# Altium PCB PCB1.PcbDoc
Units mm, origin at the board's own origin, x right, y up, seen from the top; angles counter-clockwise.
Board outline 127 x 101.6 mm, 4 copper layers (Top Layer, Internal Plane 1, Internal Plane 2, Bottom Layer); 48 components, 38 nets, 186 pads, 0 vias.
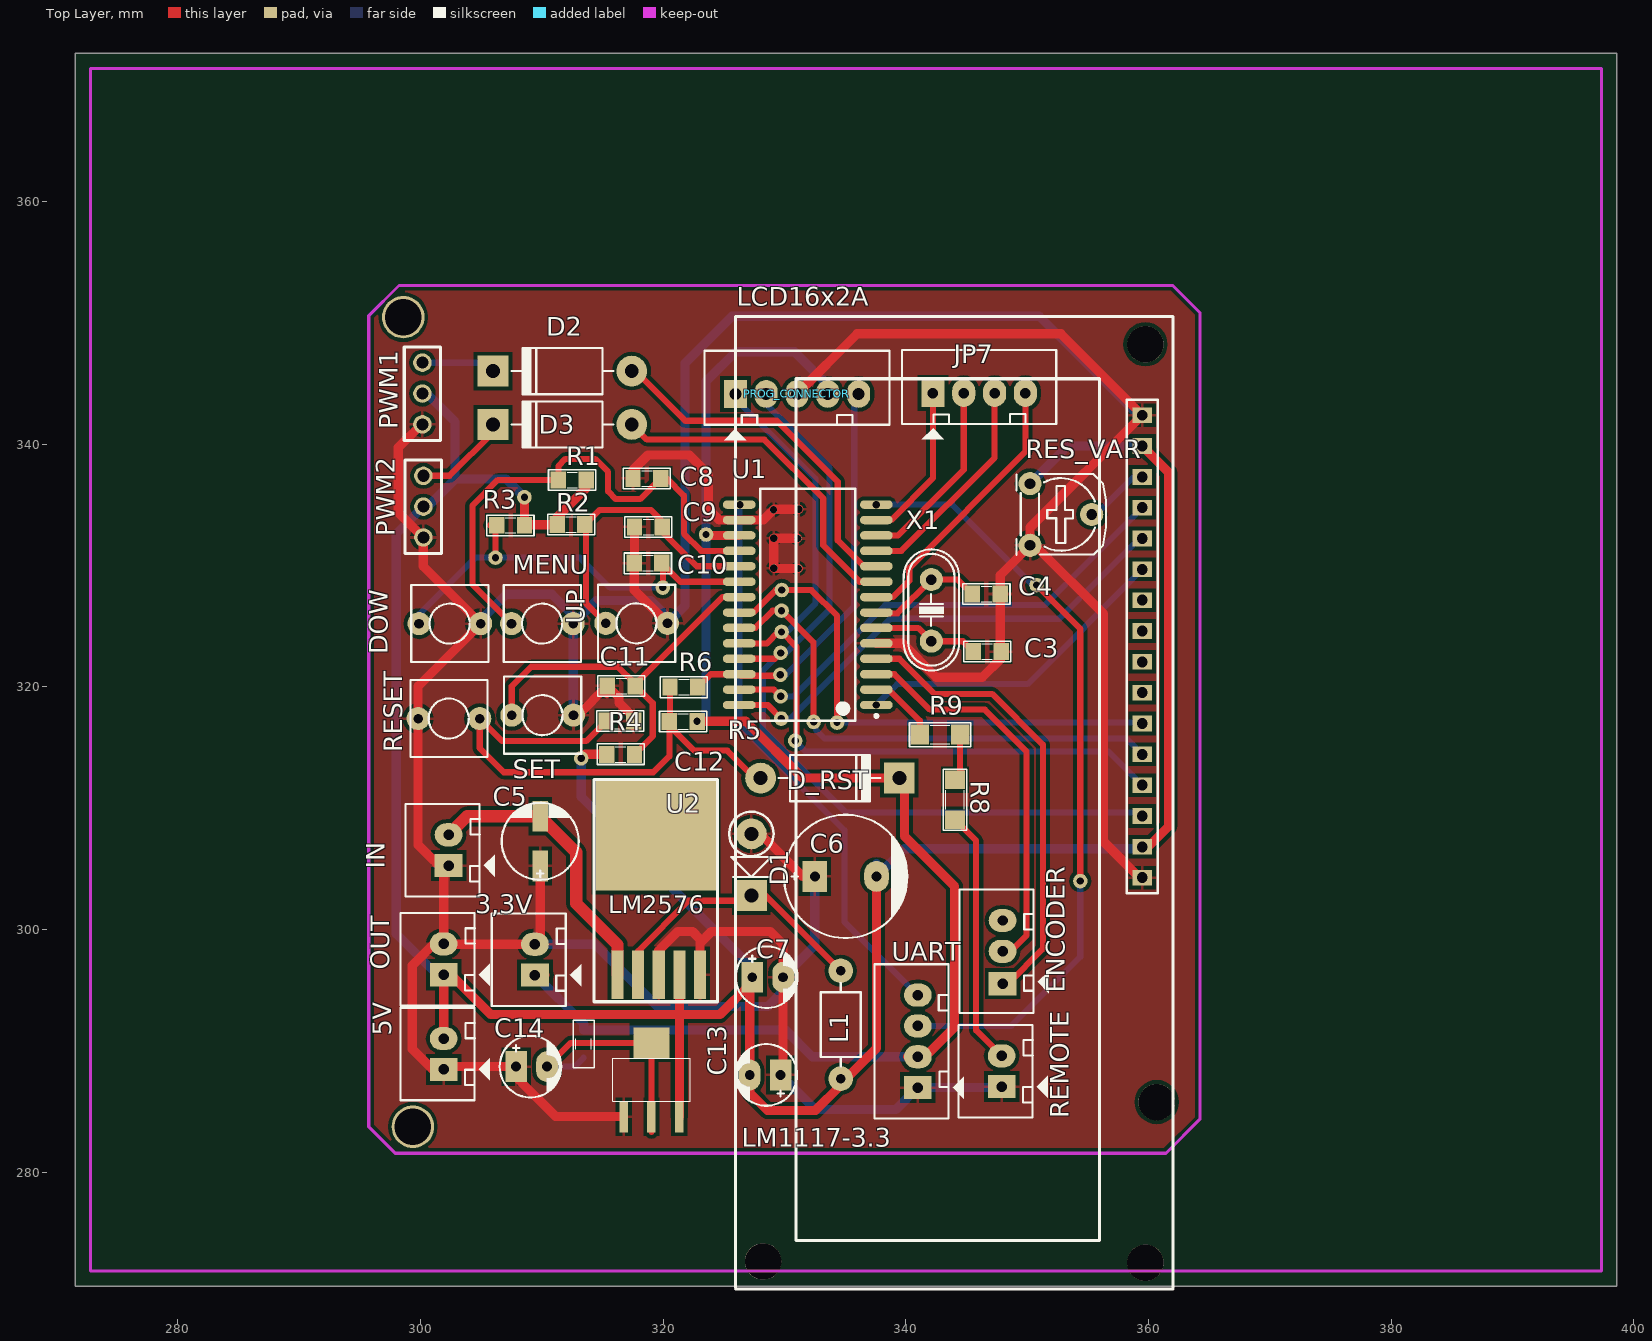
[diagram p0: Top Layer view]
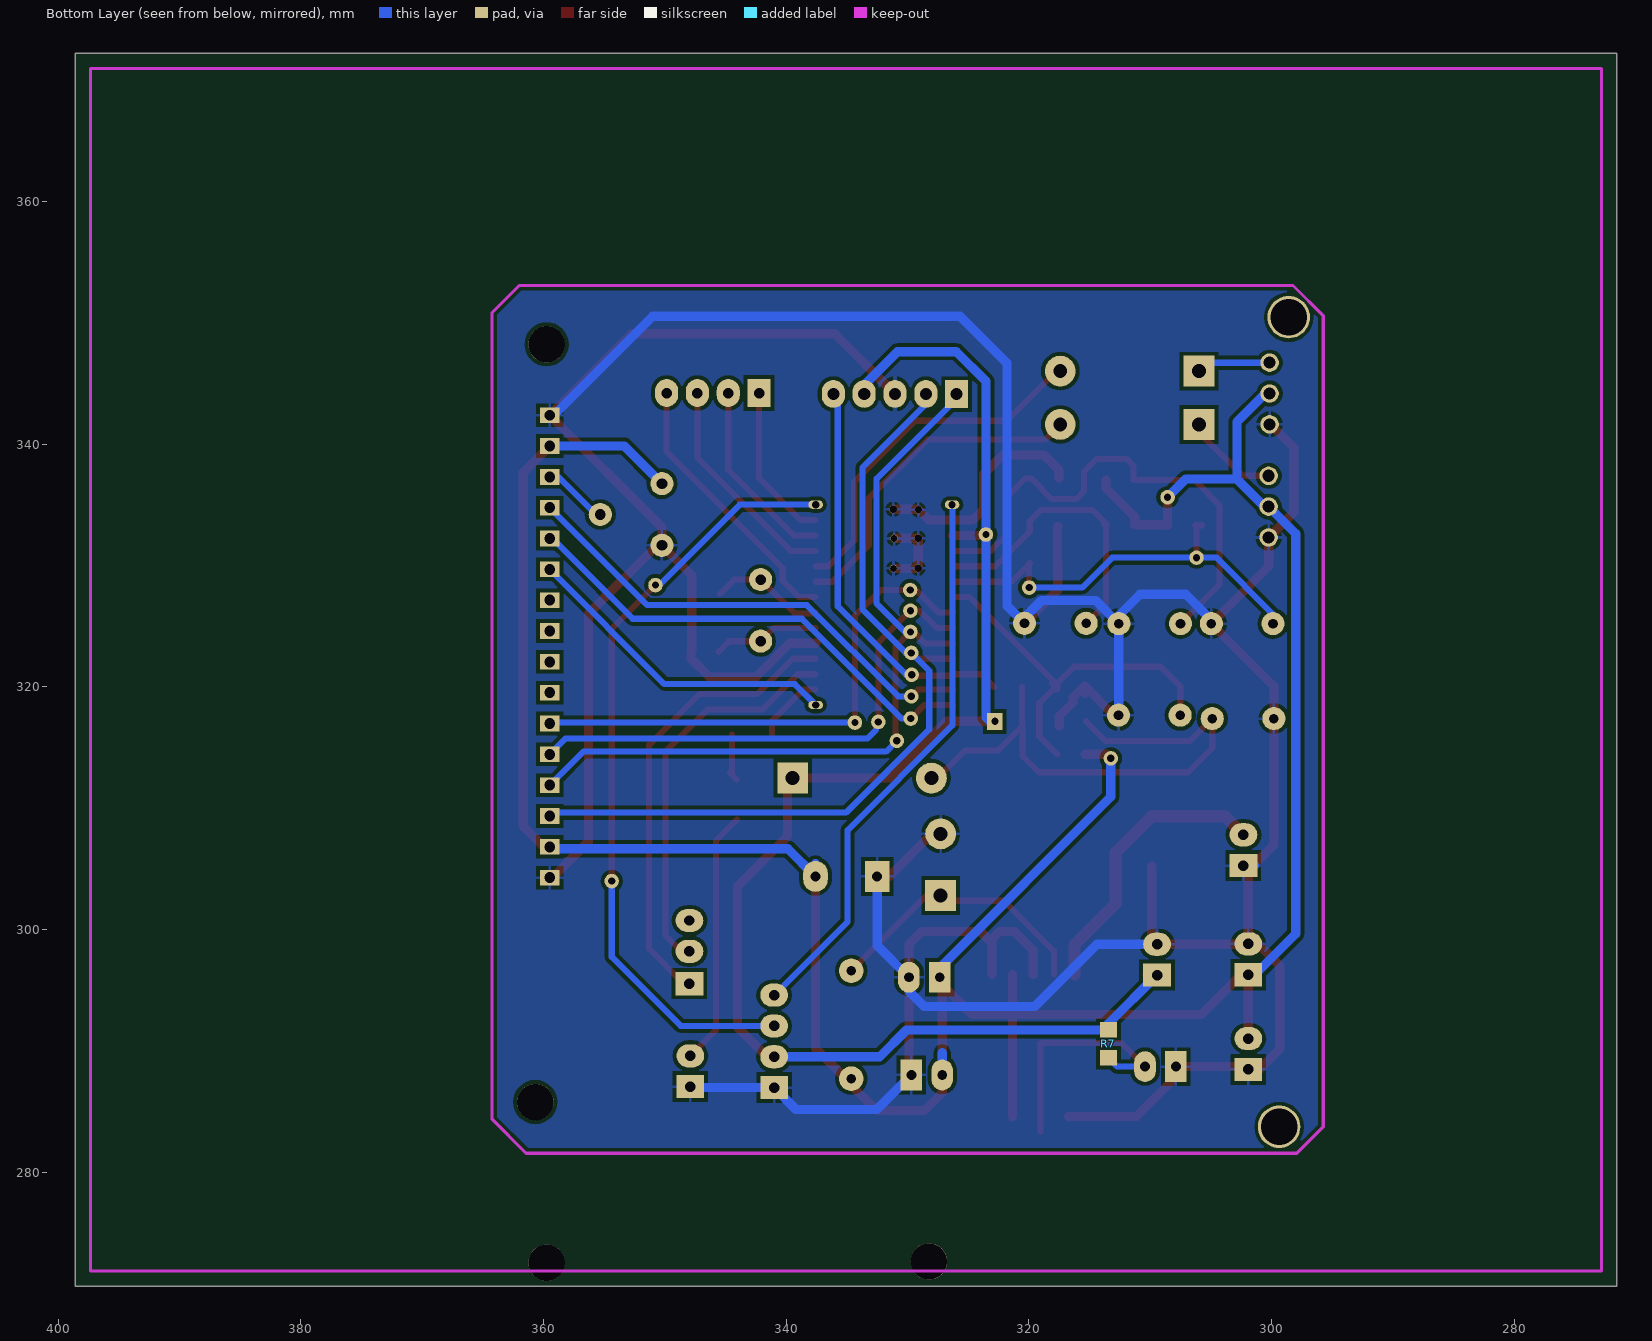
[diagram p1: Bottom Layer view, seen from below]
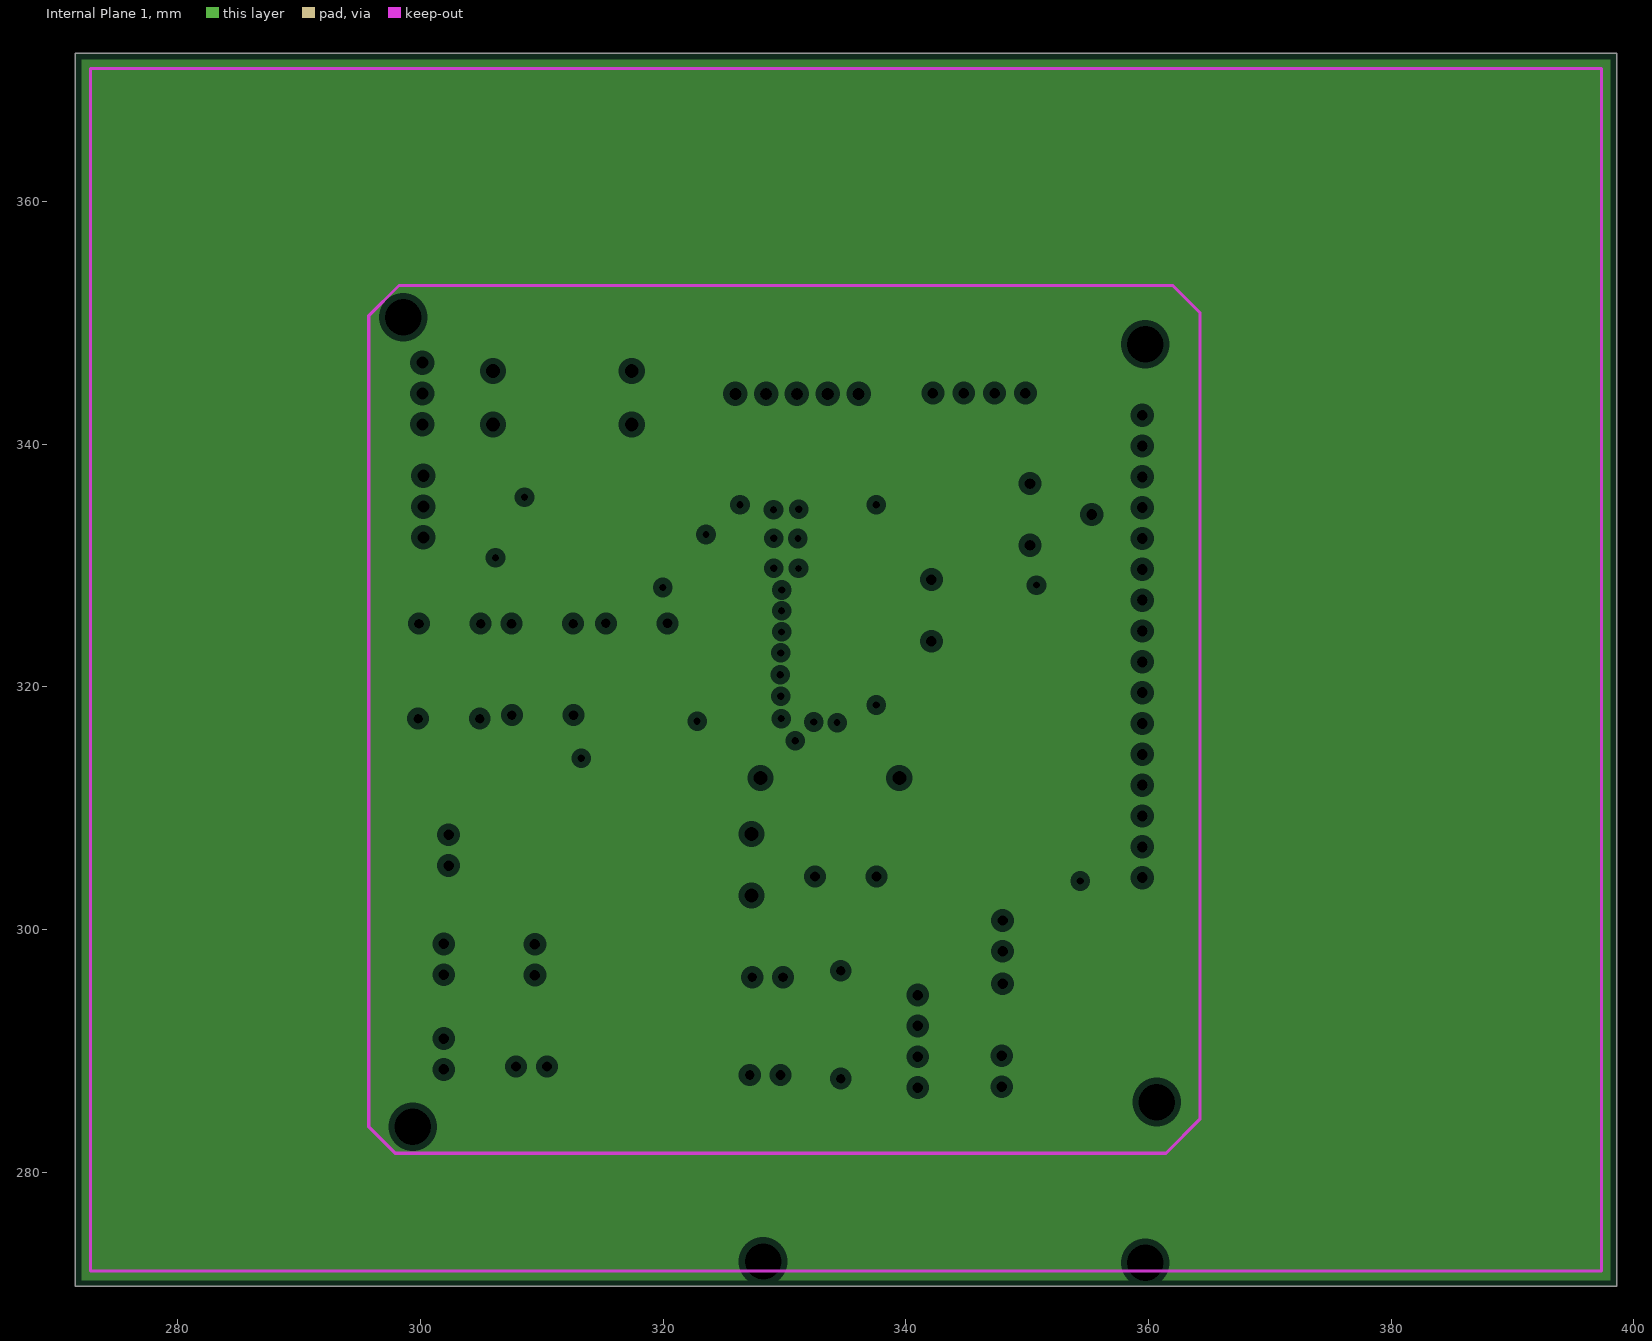
[diagram p2: Internal Plane 1, clearances drawn from the general rule]
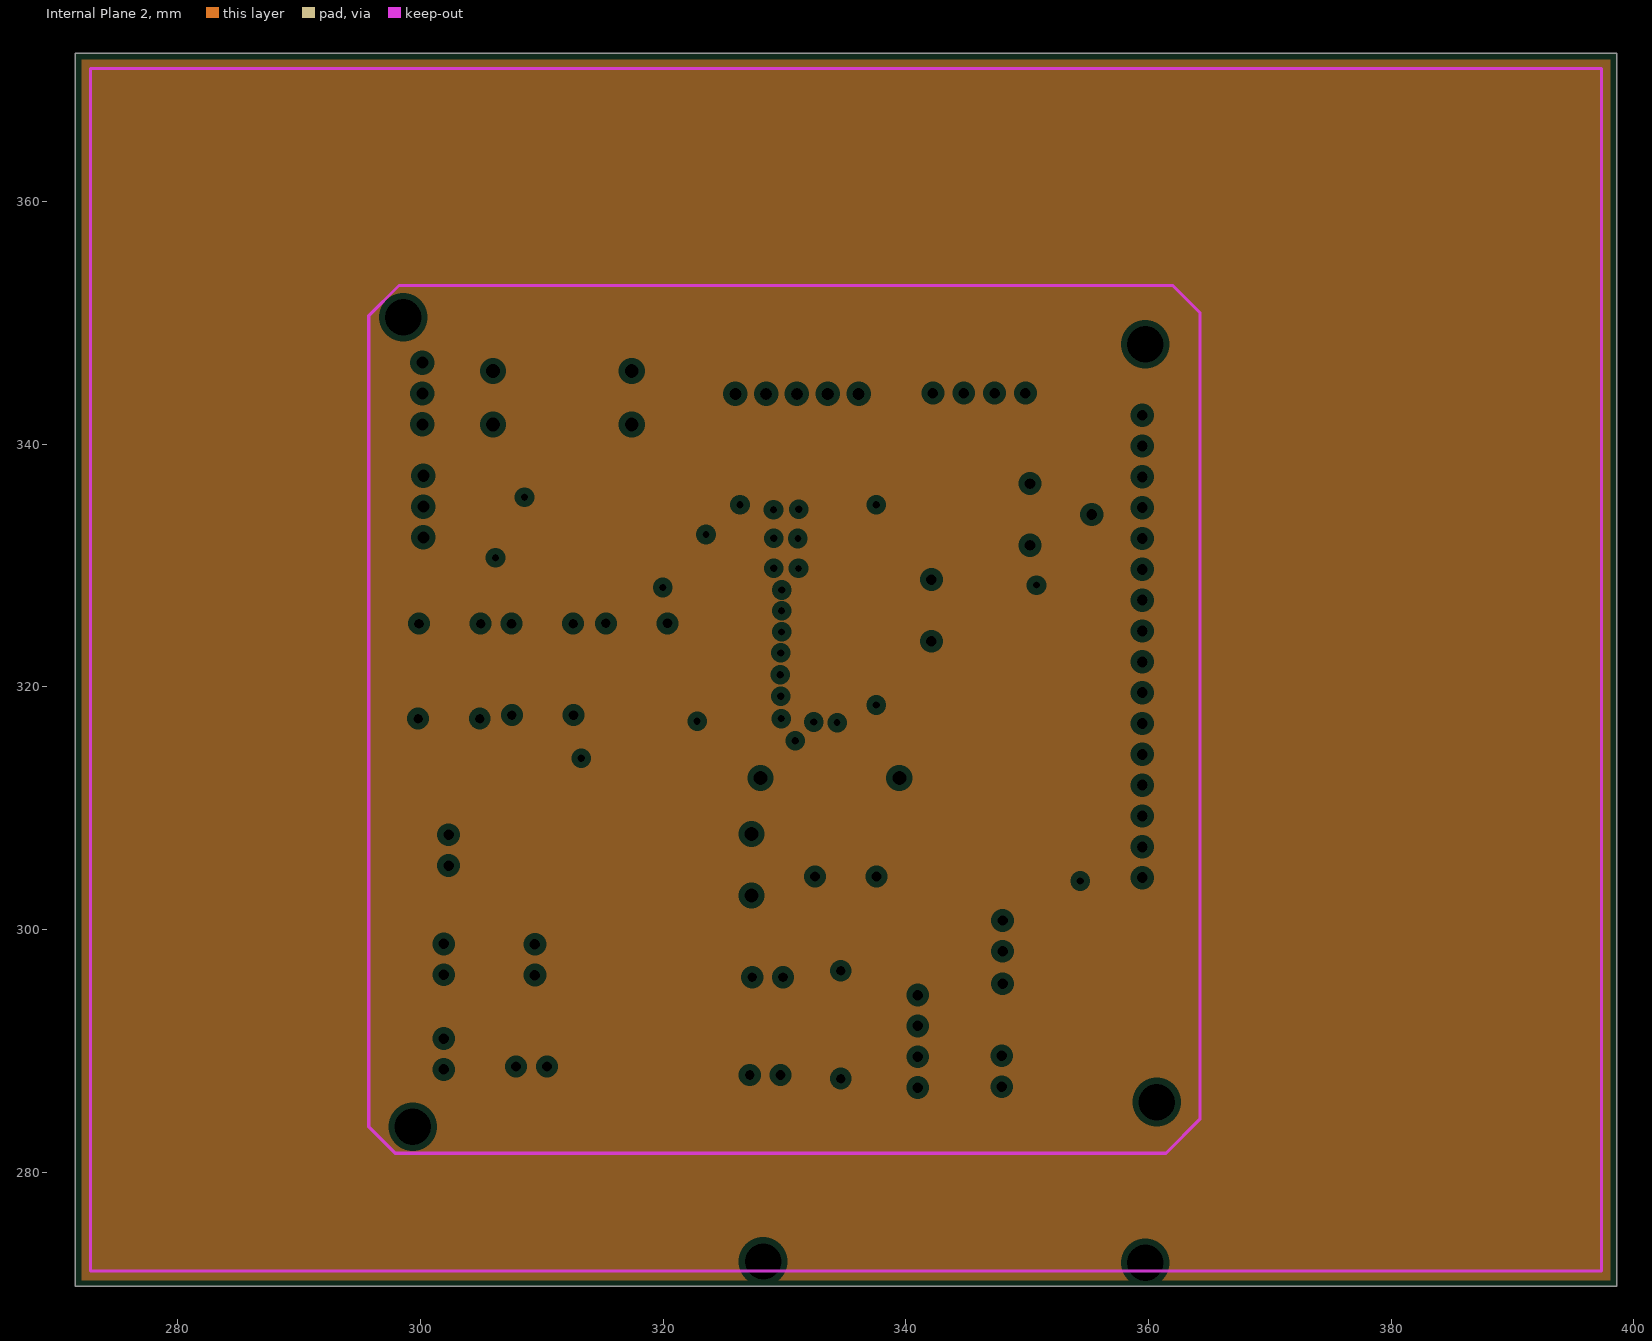
[diagram p3: Internal Plane 2, clearances drawn from the general rule]
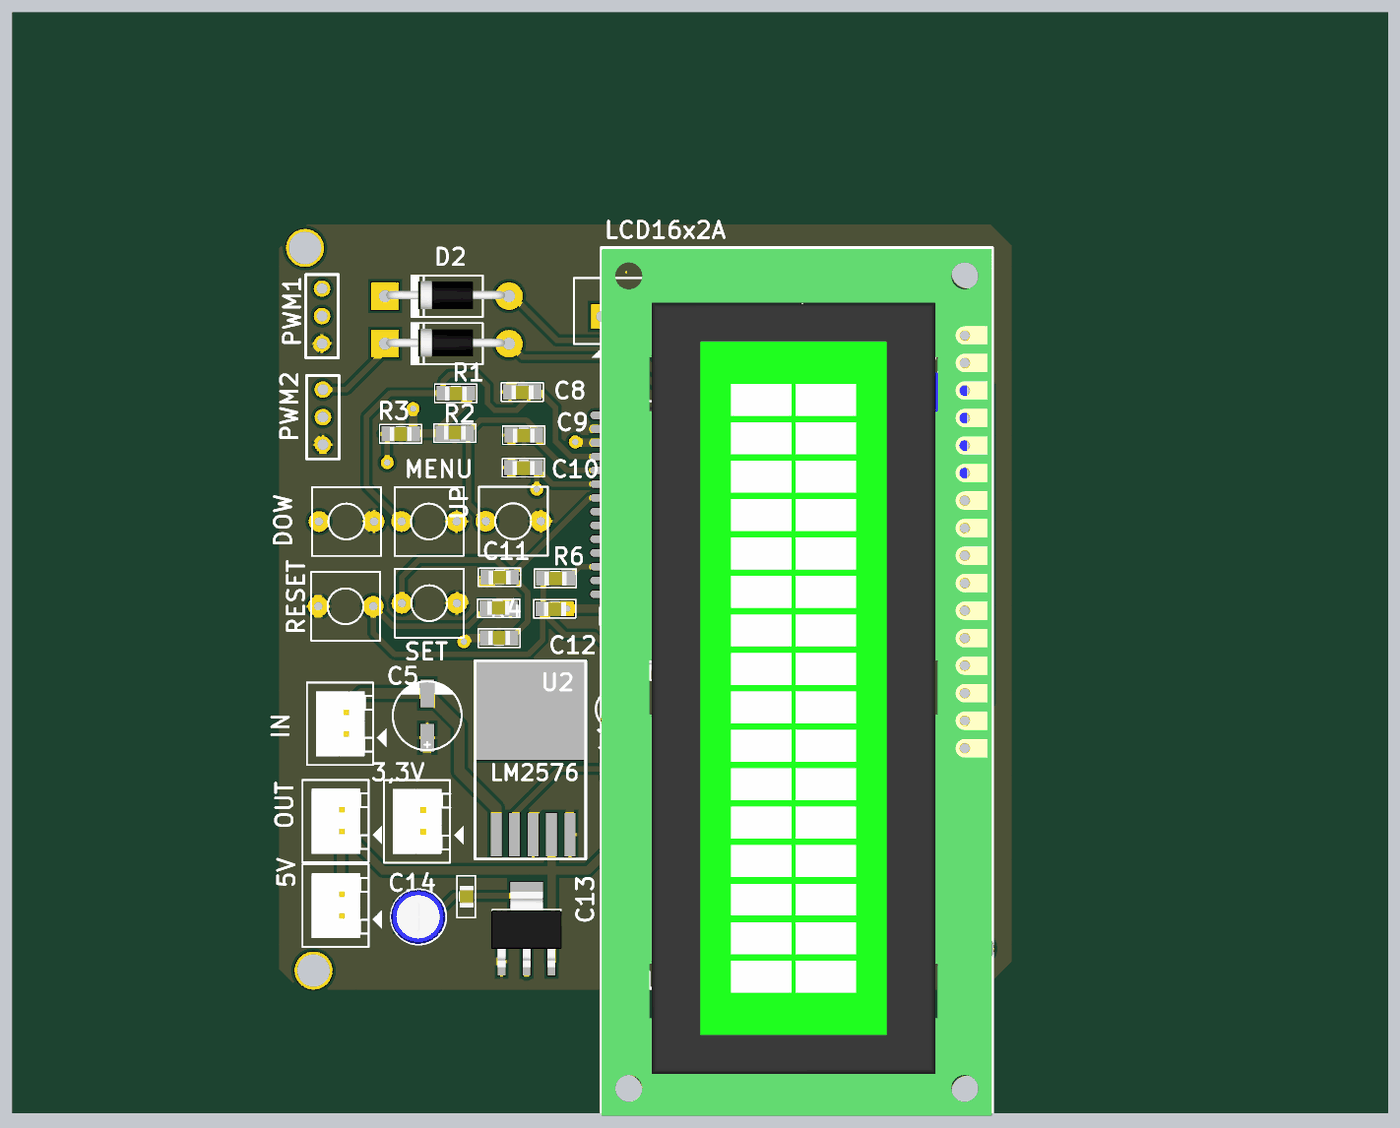
[diagram p4: 3D render of the assembled board from above, using the file's embedded part models]

## Layer stack, top to bottom
Top Layer: signal copper 0.0356
Dielectric: dielectric 0.32, FR-4, Dk 4.8
Internal Plane 1: plane copper 0.0356
Dielectric: dielectric 0.32, FR-4, Dk 4.8
Internal Plane 2: plane copper 0.0356
Dielectric: dielectric 0.32, FR-4, Dk 4.8
Bottom Layer: signal copper 0.0356

## Board outline
271.577,270.612 398.577,270.612 398.577,372.212 271.577,372.212

## Design rules (kind name [scope] priority, off if disabled: settings)
Clearance [All] p1: gap=0.305
PlaneClearance [All] p1: clearance=0.508
PlaneConnect [All] p1: planeconnectstyle=Relief reliefexpansion=0.508 reliefentries=4 reliefconductorwidth=0.254 reliefairgap=0.254
PolygonConnect [All] p1: connectstyle=Relief reliefconductorwidth=0.254 reliefentries=4 polygonreliefangle="90 Angle"
RoutingVias [All] p1: holewidth=0.635 width=1.016 viastyle="Through Hole" minholewidth=0.711 minwidth=1.27 maxholewidth=0.711 maxwidth=1.27
SilkscreenOverComponentPads [All] p1: minsilkscreentomaskgap=0.254
SolderMaskExpansion [All] p1: expansion=0.102
Width Width_4 [InNet('NetC5_2')] p1: maxlimit=1.016 minlimit=1.016 preferedwidth=1.016
Width Width_3 [InNet('GND')] p2: maxlimit=0.762 minlimit=0.762 preferedwidth=0.762
Width Width_2 [InNet('5VDC')] p3: maxlimit=0.762 minlimit=0.762 preferedwidth=0.762
Width Width_1 [InNet('3.3VDC')] p4: maxlimit=0.762 minlimit=0.762 preferedwidth=0.762
Width [All] p5: maxlimit=0.508 minlimit=0.508 preferedwidth=0.508
25 further rules are at their usual default settings.

## Components (designator, comment, footprint, x,y, rotation, side; value= is the part's Value field where it differs from the comment)
3,3V "JP2" CON2 309.448,296.266 r90 top
5V "JP2" CON2 301.93,288.493 r90 top
C3 "22" SM-0805#1 346.71,322.91 r180 top
C4 "22" SM-0805#1 346.634,327.66 r180 top
C5 "100uF" CP1/2.5_SM 309.88,306.019 r90 top
C6 "1000uF" CP2/4 332.511,304.394 r0 top
C7 "0.1uF" CP1/2 327.355,296.088 r0 top
C8 "Cap" SM-0805#1 318.668,337.185 r0 top
C9 "Cap" SM-0805#1 318.795,333.197 r0 top
C10 "Cap" SM-0805#1 318.77,330.2 r0 top
C11 "Cap" SM-0805#1 316.56,320.091 r0 top
C12 "104" SM-0805#1 316.459,317.195 r180 top
C13 "Cap" CP1/2 329.692,288.036 r180 top
C14 "Cap" CP1/2 307.899,288.722 r0 top
D1 "1N4007" D2AN 327.279,302.819 r90 top
D2 "1N4007" D2A 305.994,346.024 r0 top
D3 "1N4007" D2A 305.994,341.63 r0 top
D_RST "1N5408" D2A 339.471,312.496 r180 top
DOW "SW" SW2 299.898,325.222 r0 top
ENCODER "JP3" CON3#1 347.98,295.681 r90 top
IN "CON2" CON2 302.336,305.283 r90 top
JP7 "JP4" CON4 342.24,344.221 r0 top
L1 "100" L/0.4 334.645,296.621 r270 top
LCD16x2A "LCD" LCD16X2 359.486,342.392 r270 top
LM1117-3.3 "LM1117MP-1.2" LM1117-SOP 319.049,285.852 r0 top
MENU "SW" SW2 307.518,325.222 r0 top
OUT "JP2" CON2 301.93,296.291 r90 top
PROG_CONNECTOR "" CON5 325.958,344.145 r0 top
PWM1 "JP3" CON3#2 300.177,344.221 r270 top
PWM2 "JP3" CON3#2 300.253,334.899 r270 top
R1 "4.7K" SM-0805#1 312.522,337.058 r0 top
R2 "4.7K" SM-0805#1 312.42,333.375 r180 top
R3 "4.7K" SM-0805#1 307.442,333.324 r0 top
R4 "4.7K" SM-0805#1 316.509,314.452 r180 top
R5 "22k" SM-0805#2 321.666,317.17 r0 top
R6 "1k" SM-0805#1 321.716,319.989 r0 top
R7 "Res1" SM-0805#3 313.461,290.601 r90 top
R8 "330K" SM-1206 344.068,310.718 r90 top
R9 "330K" SM-1206 342.824,316.078 r180 top
REMOTE "JP2" CON2 347.904,287.071 r90 top
RES_VAR "10K" VR 350.241,336.753 r270 top
RESET "RST_BUTTON" SW2 299.822,317.398 r0 top (schematic designator SW0)
SET "SW" SW2 307.543,317.678 r0 top
U1 "PIC18F26K20-E/ML" SOP_28M_127 331.927,326.771 r180 top
U2 "LM2576/TO_220" LM2576_SMD 316.205,296.266 r0 top
UART "CON4" CON4 340.995,286.995 r90 top
UP "SW" SW2 315.29,325.247 r0 top
X1 "8Mhz" XT2 342.113,326.314 r270 top

## Footprints (in the part's own frame and the unit in brackets; to place one, negate y for a bottom-side part, rotate by r counter-clockwise, add the part's x,y. Pads: shape width x height; smd on the part's side, far side on the other; paste and mask are expansions set on the pad)
CON2 [mil] "CON2"
  rect 75x90 hole 34: 1(0,0)
  oval 75x90 hole 34: 2(100,0)
  silkscreen extent -100,-150 200,140, body extent -68,-70 168,107, height 236
CON3#1 [mil] "CON 3"
  rect 75x90 hole 34: 1(-5,0)
  oval 75x90 hole 34: 2(100,0) 3(200,0)
  silkscreen extent -100,-150 300,140, body extent -95,-90 295,136, height 276
CON3#2 [mil] "3-Pin Connector; pitch 2.54mm"
  round 60 hole 39.37: 1(-98.43,0) 2(1.57,0) 3(101.57,0)
  silkscreen extent -150,-59 154,59
CON4 [mil] "CON4"
  rect 75x90 hole 34: 1(0,0)
  oval 75x90 hole 34: 2(100,0) 3(200,0) 4(300,0)
  silkscreen extent -100,-150 400,140, body extent -90,-90 398,136, height 276
CON5 [mm] "CON5"
  rect 1.905x2.286 hole 1: 1(0,0)
  oval 1.905x2.286 hole 1: 2(2.54,0) 3(5.08,0) 4(7.62,0) 5(10.16,0)
  silkscreen extent -2.54,-3.8 12.7,3.56, body extent -2.63,-2.7 12.83,3.7, height 7
CP1/2 [mil] "Tu hoa  Dia = 5mm < 22uF/16>50V"
  rect 70x100 hole 32: 1(0,0)
  oval 70x100 hole 32: 2(100,0)
  silkscreen extent -53,-100 147,100, body extent -54,-99 144,100, height 296
CP1/2.5_SM [mil] "Tu hoa SMD 33 >100 uF,50V, 220uF/16V,25V"
  rect 100x50 smd: 1(-30,0) 2(131,0)
  silkscreen extent -75,-125 175,125
CP2/4 [mil] "Tu hoa 1000uF/16V/25V"
  rect 80x100 hole 32: 1(0,0)
  oval 80x100 hole 32: 2(200,0)
  silkscreen extent -100,-200 300,200
D2A [mil] "Diode 2A, W 150mil, L 450mil"
  round 100 hole 45: 1(450,0)
  rect 100x100 hole 45: 2(0,0)
  silkscreen extent 61,-75 391,75, body extent 5,-47 435,54, height 100
D2AN [mil] "Diode 2A, W 150mil, L 450mil"
  round 100 hole 45: 1(200,0)
  rect 100x100 hole 45: 2(0,0)
  silkscreen extent 60,-72 272,72, body extent 46,-50 214,55, height 252
L/0.4 [mil] "Inductor , 2 Pin, L 350mil, W 150 mil"
  round 80 hole 31: 1(0,0) 2(350,0)
  silkscreen extent 40,-65 310,65
LCD16X2 [mm] "LCD 16x2"
  rect 1.3x1.6 hole 0.9: 1(0,0) 2(2.54,0) 3(5.08,0) 4(7.62,0) 5(10.16,0) 6(12.7,0) 7(15.24,0) 8(17.78,0) 9(20.32,0) 10(22.86,0) 11(25.4,0) 12(27.94,0) 13(30.48,0) 14(33.02,0) 15(35.56,0) 16(38.1,0)
  round 3 hole 3 paste+0 mask+0: ""(-5.842,0.254) ""(69.825,0.254)
  round 0 all layers, no hole: ""(-5.842,-31.242)
  round 3 hole 3: ""(69.723,-31.242)
  silkscreen extent -8.13,-33.53 72.01,2.54, body extent -8,-33.5 72,2.5, height 19
LM1117-SOP [mm]
  rect 0.7x2.54 smd: 1(-2.3,-1.27) 2(0,-1.27) 3(2.3,-1.27)
  rect 3x2.54 smd: 2(0,4.826)
  silkscreen extent -3.17,0 3.17,3.56, body extent -3.25,-1.78 3.25,5.18, height 1.68
LM2576_SMD [mm]
  rect 1x4 smd: 1(0.045,0.041) 2(1.745,0.041) 3(3.445,0.041) 4(5.145,0.041) 5(6.845,0.041)
  rect 10x9 smd: 6(3.22,11.471)
  silkscreen extent -1.9,-2.2 8.3,16.1
SM-0805#1 [mil] "Compoment SMD 80x50mil"
  rect 50x55 smd: 1(-45,0) 2(45,0)
  silkscreen extent -77,-34 76,33, body extent -40,-27 40,23, height 24
SM-0805#2 [mil] "Compoment SMD 80x50mil"
  rect 50x55 smd: 1(-45,0)
  rect 50x55 hole 23.62: 2(45,0)
  silkscreen extent -77,-34 76,33, body extent -40,-27 40,23, height 24
SM-0805#3 [mil] "Compoment SMD 80x50mil"
  rect 50x55 smd far side: 1(-45,0) 2(45,0)
  silkscreen extent -77,-34 76,33, body extent -40,-27 40,23, height 24
SM-1206 [mil] "Compoment SMD 120x60mil"
  rect 60x65 smd: 1(-65,0) 2(65,0)
  silkscreen extent -99,-38 99,39, body extent -83,-35 83,36, height 25
SOP_28M_127 [mm] "SOP, 28-Leads, Body 18.1x8.6mm, Pitch 1.27mm, IPC Low Density"
  oval 2.7x0.7 smd: 1(-5.65,8.255) 2(-5.65,6.985) 3(-5.65,5.715) 4(-5.65,4.445) 5(-5.65,3.175) 6(-5.65,1.905) 7(-5.65,0.635) 8(-5.65,-0.635) 9(-5.65,-1.905) 10(-5.65,-3.175) 11(-5.65,-4.445) 12(-5.65,-5.715) 13(-5.65,-6.985) 14(-5.65,-8.255) 15(5.65,-8.255) 16(5.65,-6.985) 17(5.65,-5.715) 18(5.65,-4.445) 19(5.65,-3.175) 20(5.65,-1.905) 21(5.65,-0.635) 22(5.65,0.635) 23(5.65,1.905) 24(5.65,3.175) 25(5.65,4.445) 26(5.65,5.715) 27(5.65,6.985) 28(5.65,8.255)
  silkscreen extent -5.77,-9.55 3.9,9.55, body extent -5.34,-9.04 5.33,9.04, height 2.64
SW2 [mil] "SW button 2pin, 250x 250 mil"
  round 75 hole 31: 1(0,0) 2(200,0)
  silkscreen extent -25,-125 225,125
VR [mil] "Resistor Variable"
  round 75 hole 35: 1(0,0) 2(100,200) 3(200,0)
  silkscreen extent -31,-44 231,246, body extent -87,-30 307,372, height 165
XT2 [mil] "Footpin for Crystal 2 pin"
  round 75 hole 34: 1(-100,0) 2(100,0)
  silkscreen extent -198,-90 195,90, body extent -233,-93 213,90, height 138

## Part data
3,3V 5V OUT REMOTE: library part Con2, "Connector 2"
C3 C4 C5 C6 C12: library part CM, "Cap SMD"
C7: library part CP1, "Cap P  0,1uF < 22uF , 16 - 50V"
C8 C9 C10 C11 C13 C14: "Capacitor"
D1 D2 D3: library part D1A, "Diode 1A"
D_RST: library part D5A, "Diode 5A"
DOW MENU RESET SET UP: library part SW2, "Switch button 2 pin"
ENCODER PWM1 PWM2: library part Con3, "Connector 3"
JP7: library part Con4, "Connector 4"
L1: library part L1, "Inductor"
LCD16x2A: library part LCD16x2, "LCD dipslay 16 char, 2 line"
LM1117-3.3: library part LM1117MP-2.5, "800mA Low-Dropout Linear Regulator"
PROG_CONNECTOR: library part Con5, "Connector 5"
R1 R2 R3 R4 R5 R6 R8 R9: library part R, "Resistor 1/4W"
R7: "Resistor"
RES_VAR: library part VOL-S, "Var Resistor"
U1: "Flash Microcontroller with 10-Bit A/D and nanoWatt Technology, 64K Flash, 28-Pin QFN, Extended Temperature Range"
UART: "4-Pin Connector; pitch 2.54mm"
X1: library part XT2, "Crystal For all Crystal 2pin."

## Free pads (board coordinates)
  round 1.2 hole 0.6: 1(319.989,328.193) 2(306.197,330.657) 3(329.692,322.809) 4(329.794,327.99) 5(329.768,324.536) 6(329.768,326.288) 7(329.667,321.005) 8(323.545,332.562) 10(330.886,315.57) 11(332.41,317.119) 12(334.34,317.068) 13(313.258,314.122) 14(329.692,319.227) 15(329.743,317.398) 20(350.774,328.397) 21(354.381,304.013) 22(308.585,335.636)
  oval 1.2x0.7 hole 0.6: 16(337.577,318.516) 17(326.339,335.026) 18(337.577,335.026)
  round 3.5 hole 3: 23(298.602,350.469) 27(299.39,283.769)
  round 0.6 hole 0.6: 24(329.133,332.257) 25(329.133,329.794) 26(331.165,329.768) 29(331.114,332.232) 30(331.191,334.645) 31(329.108,334.594)
  round 3 hole 3: 28(360.68,285.801)

## Nets (pads, with @x,y where several pads share a name; then routed paths per layer and width w, separated by ;. In a path a pad name is that pad's centre, name@x,y a point inside that pad or via, vN(x,y) a via of type N, cw(c..) or ccw(c..) an arc to the next point about the centre after c; other vN are vias at no path point)
3.3VDC: 3,3V.1 D_RST.2 pad.8 PROG_CONNECTOR.4 R5.2 R7.2 U1.17 UART.2 | length 126.1
  Top Layer w0.762: 309.448,296.266 310.286,296.266 ; R5.2 326.822,317.17 331.495,312.496 D_RST.2 ; pad.8 323.621,332.486 U1.17 ; D_RST.2@339.801,312.166 D_RST.2 ; UART.2@340.157,289.535 UART.2 341.579,289.535 344.018,291.973 344.018,303.581 339.903,307.696 339.903,311.912 339.471,312.344 D_RST.2
  Bottom Layer w0.762: 309.448,296.266 313.461,292.252 R7.2 330.098,291.744 332.308,289.535 UART.2 ; R5.2 323.215,317.17 323.545,317.5 pad.8 323.545,345.186 325.984,347.624 330.835,347.624 333.578,344.881 PROG_CONNECTOR.4
5VDC: 5V.2 C6.2 C7.1 C13.2 L1.2 LCD16x2A.2 LCD16x2A.15 LM1117-3.3.3 OUT.1 pad.13 pad.22 PWM1.2 PWM2.2 R1.2 R2.2 R3.2 R4.2 RES_VAR.1 U2.4 | length 252.4
  Top Layer w0.762: 5V.2 OUT.1 302.539,296.291 305.816,293.014 321.299,293.014 ; pad.22 R3.2 308.635,333.375 R2.2 311.277,334.01 313.665,336.398 R1.2 ; pad.13 313.588,314.452 R4.2 ; LM1117-3.3.3 321.349,292.964 ; 321.35,294.223 U2.4 321.349,293.014 ; C6.2 337.591,290.246 335.077,287.731 L1.2 334.645,287.198 332.562,285.115 328.6,285.115 327.152,286.563 C13.2 327.152,295.072 327.355,295.275 C7.1 327.152,295.885 327.152,295.478 324.688,293.014 321.349,293.014 ; LCD16x2A.15 359.969,306.832 361.671,308.534 361.671,337.668 LCD16x2A.2 ; 321.299,293.014 321.349,292.964 ; 321.299,293.014 321.349,293.014 ; 321.349,292.964 321.349,293.014
  Bottom Layer w0.762: PWM1.2 300.522,344.181 302.87,341.833 302.87,337.134 ; OUT.1 301.396,296.291 298.018,299.669 298.018,332.624 PWM2.2 300.594,334.859 302.87,337.134 ; pad.22 307.086,337.134 302.87,337.134 ; pad.13 313.258,310.947 327.355,296.85 C7.1 ; C13.2 327.152,289.865 ; C6.2@337.591,303.581 C6.2 ; C6.2@337.591,305.435 C6.2 ; RES_VAR.1 353.339,339.852 LCD16x2A.2 ; LCD16x2A.15 359.334,306.68 339.877,306.68 C6.2
D4: LCD16x2A.11 pad.4 pad.12 U1.22 | length 43.7
  Top Layer w0.508: U1.22 327.431,326.136 329.286,327.99 pad.4 332.232,327.99 334.34,325.882 pad.12
  Bottom Layer w0.508: pad.12 359.41,317.068 LCD16x2A.11
D5: LCD16x2A.12 pad.6 pad.11 U1.23 | length 42
  Top Layer w0.508: U1.23 327.609,324.866 329.032,326.288 pad.6 332.41,323.647 pad.11
  Bottom Layer w0.508: 332.626,316.446 333.324,315.747 358.191,315.747 LCD16x2A.12
EN: LCD16x2A.6 pad.16 U1.1 | length 26.5
  Bottom Layer w0.508: pad.16 339.304,320.243 350.037,320.243 LCD16x2A.6
GND: 3,3V.2 5V.1 C3.1 C4.1 C5.1 C6.1 C7.2 C8.1 C9.1 C10.1 C11.1 C12.1 C13.1 C14.1 D1.1 DOW.2 IN.1 LCD16x2A.1 LCD16x2A.16 LM1117-3.3.1 MENU.2 OUT.2 pad.24 pad.25 pad.26 pad.29 pad.30 pad.31 PROG_CONNECTOR.3 PWM1.3 PWM2.3 REMOTE.1 RES_VAR.3 RESET.1 SET.2 U1.5 U1.16 U2.3 U2.5 UART.1 UP.2 | length 421.9
  Top Layer w0.762: PWM1.3 300.112,341.641 298.196,339.725 298.196,334.376 PWM2.3 300.253,329.946 DOW.2 299.822,320.065 RESET.1 299.822,306.984 IN.1@301.93,304.876 ; OUT.2@301.701,299.06 OUT.2 ; IN.1 IN.1@301.93,304.876 ; C5.1 309.88,299.237 309.448,298.806 301.955,298.806 OUT.2 ; SET.2 SET.2@313.004,317.678 ; SET.2@313.233,317.678 SET.2@313.004,317.678 ; C11.1@315.366,319.481 C11.1@315.366,319.811 ; LM1117-3.3.1 316.724,284.607 311.15,284.607 307.899,287.858 C14.1 302.158,288.722 5V.1 301.015,288.493 299.339,290.17 299.339,297.053 301.117,298.831 OUT.2 ; C12.1@317.5,316.814 C12.1@317.5,317.398 ; C12.1@317.5,317.589 316.382,318.707 316.382,319.126 C11.1 SET.2@313.004,317.678 ; C8.1 317.525,337.871 318.77,339.115 322.174,339.115 323.748,337.541 323.748,334.645 324.637,333.756 U1.16 328.27,333.756 pad.31 329.159,334.645 pad.30 ; C9.1@317.627,333.223 C9.1 317.652,330.225 C10.1 317.627,327.99 UP.2 ; U2.3 319.65,298.288 321.208,299.847 322.428,299.847 323.05,299.225 323.05,298.895 ; U2.5 323.05,298.895 ; D1.1@327.609,307.569 D1.1 328.016,307.899 331.521,304.394 C6.1 ; pad.25 pad.24 pad.29@331.089,332.257 ; pad.25@329.159,329.768 pad.26 ; C13.1 329.895,288.239 C7.2 329.895,298.78 328.828,299.847 324.002,299.847 323.05,298.895 ; PROG_CONNECTOR.3 335.991,349.098 352.781,349.098 LCD16x2A.1 350.241,333.146 RES_VAR.3 ; U1.5 339.725,323.596 342.519,320.802 346.304,320.802 347.853,322.351 C3.1 347.777,322.986 C4.1 347.777,329.209 349.961,331.394 350.926,331.394 356.286,326.034 356.286,307.264 359.258,304.292 LCD16x2A.16 ; OUT.2 IN.1@301.93,304.876
  Bottom Layer w0.762: IN.1@301.422,305.283 IN.1 ; DOW.2 304.978,325.526 307.086,327.635 310.845,327.635 312.598,325.882 MENU.2 ; 309.448,298.806 314.401,298.806 319.532,293.675 328.625,293.675 329.895,294.945 C7.2 332.511,298.704 C6.1 ; SET.2 312.598,317.703 MENU.2 ; D1.1 D1.1@327.609,307.569 ; C13.1 332.537,285.191 339.192,285.191 UART.1 347.828,286.995 REMOTE.1 ; LCD16x2A.1 359.435,342.443 359.105,342.443 351.003,350.545 325.679,350.545 321.818,346.685 321.818,326.695 UP.2 320.37,325.73 318.973,327.127 314.503,327.127 MENU.2
INT0: ENCODER.3
NetC5_2: C5.2 IN.2 U2.1 | length 23.9
  Top Layer w1.016: IN.2 303.86,309.347 C5.2 312.852,306.375 312.852,302.158 316.25,298.761 U2.1
NetC12_2: C12.2 D_RST.1 R5.1 R6.1 RESET.2 | length 46.2
  Top Layer w0.508: C12.2 313.665,315.544 306.756,315.544 RESET.2 304.902,314.96 306.883,312.979 319.202,312.979 320.523,314.3 R5.1@320.523,316.662 ; R6.1 320.573,317.221 R5.1 320.523,316.814 322.58,314.757 325.298,314.757 327.558,312.496 D_RST.1
NetC14_2: C14.2 LM1117-3.3.2 R7.1 | length 20.5
  Top Layer w0.508: C14.2@310.744,288.417 C14.2 312.395,290.678 319.049,290.678 319.049,284.582 LM1117-3.3.2@319.049,283.362
  Bottom Layer w0.508: C14.2 312.725,288.722 R7.1
NetD1_2: D1.2 L1.1 U2.2 | length 23.1
  Top Layer w0.508: U2.2 317.95,298.239 322.097,302.387 326.847,302.387 D1.2 328.447,302.819 L1.1
NetD2_2: D2.2 PWM1.1 | length 6.1
  Bottom Layer w0.508: PWM1.1 305.297,346.721 D2.2
NetD3_2: D3.2 PWM2.1 | length 7.9
  Top Layer w0.508: PWM2.1 302.398,337.399 305.994,340.995 D3.2
NetJP7_1: JP7.1 U1.13 | length 13.1
  Top Layer w0.508: U1.13 338.785,333.756 342.24,337.21 JP7.1
NetJP7_2: JP7.2 U1.12 | length 15.8
  Top Layer w0.508: U1.12 339.369,332.486 344.78,337.896 JP7.2
NetJP7_3: JP7.3 U1.11 | length 18.3
  Top Layer w0.508: U1.11 339.649,331.216 347.32,338.887 JP7.3
NetJP7_4: JP7.4 U1.8 | length 22.7
  Top Layer w0.508: U1.8 338.938,327.406 340.284,328.752 340.284,329.794 349.86,339.369 JP7.4
NetLCD16x2A_3: LCD16x2A.3 RES_VAR.2 | length 5.4
  Bottom Layer w0.508: RES_VAR.2 355.702,334.213 358.8,337.312 LCD16x2A.3
NetR8_1: R8.1 REMOTE.2 | length 21
  Top Layer w0.508: R8.1 345.796,307.34 345.796,291.719 REMOTE.2
NetR8_2: R8.2 R9.1 | length 4.1
  Top Layer w0.508: R8.2 R8.2@344.475,312.776 ; R9.1 R8.2@344.475,312.776 ; R8.2@344.627,312.928 R8.2@344.475,312.776
OSC1: C3.2 U1.6 X1.2 | length 8.8
  Top Layer w0.508: U1.6 341.02,324.866 X1.2 344.703,323.774 C3.2
OSC2: C4.2 U1.7 X1.1 | length 9.6
  Top Layer w0.508: U1.7 337.653,326.06 339.319,326.06 X1.1 344.297,328.854 C4.2
PGC-D6: LCD16x2A.13 pad.5 pad.10 PROG_CONNECTOR.1 U1.24 | length 67.5
  Top Layer w0.508: U1.24 328.574,323.596 329.514,324.536 pad.5 330.987,323.317 pad.10@330.987,316.154
  Bottom Layer w0.508: PROG_CONNECTOR.1 325.958,343.764 332.562,337.16 332.562,326.873 330.225,324.536 pad.5 ; PROG_CONNECTOR.1@326.542,343.433 PROG_CONNECTOR.1@326.542,344.322 ; pad.10 331.775,314.681 356.718,314.681 LCD16x2A.13
PGD=D7: LCD16x2A.14 pad.3 PROG_CONNECTOR.2 U1.25 | length 70.7
  Top Layer w0.508: U1.25 329.209,322.326 pad.3
  Bottom Layer w0.508: PROG_CONNECTOR.2 328.498,343.306 333.731,338.074 333.731,326.39 330.149,322.809 pad.3 328.219,321.335 328.219,316.509 335.077,309.651 359.207,309.651 LCD16x2A.14 ; PROG_CONNECTOR.2@329.082,343.84 PROG_CONNECTOR.2@329.082,344.322
PWM1: D2.1 U1.10 | length 29.6
  Top Layer w0.508: D2.1 317.754,346.024 321.843,341.935 329.362,341.935 334.391,336.906 334.391,332.08 336.525,329.946 U1.10
PWM2: D3.1 U1.9 | length 27.8
  Top Layer w0.508: D3.1 318.668,340.385 328.346,340.385 333.197,335.534 333.197,331.673 336.194,328.676 U1.9
RA3: R9.2 U1.2 | length 5.8
  Top Layer w0.508: U1.2 338.607,319.786 341.173,317.221 R9.2
RA4: ENCODER.2 U1.3 | length 32.7
  Top Layer w0.508: U1.3 339.065,321.056 341.986,318.135 346.507,318.135 349.961,314.681 349.961,299.542 348.64,298.221 ENCODER.2
RA5: ENCODER.1 U1.4 | length 38
  Top Layer w0.508: U1.4 339.471,322.326 342.367,319.43 347.116,319.43 351.307,315.239 351.307,298.425 348.437,295.554 ENCODER.1
RS: LCD16x2A.4 pad.14 U1.27 | length 39.9
  Top Layer w0.508: U1.27 329.133,319.786 pad.14
  Bottom Layer w0.508: pad.14 330.784,319.227 338.303,326.746 351.46,326.746 LCD16x2A.4
RW: LCD16x2A.5 pad.15 U1.28 | length 39.8
  Top Layer w0.508: U1.28 328.625,318.516 pad.15
  Bottom Layer w0.508: pad.15 330.479,317.398 338.709,325.628 352.654,325.628 359.258,332.232 LCD16x2A.5
RX: pad.17 U1.15 UART.4 | length 46.5
  Bottom Layer w0.508: pad.17 326.314,335.001 326.314,316.84 334.95,308.204 334.95,300.66 UART.4
SW1: C8.2 MENU.1 R1.1 U1.18 | length 42.6
  Top Layer w0.508: MENU.1 304.292,328.447 304.292,334.95 306.4,337.058 R1.1 311.379,338.201 311.963,338.785 314.401,338.785 315.468,337.718 315.468,336.118 316.103,335.483 318.11,335.483 C8.2 320.294,337.185 321.716,335.763 321.716,332.638 323.139,331.216 U1.18
SW2: C9.2 R2.1 U1.19 UP.1 | length 24.8
  Top Layer w0.508: UP.1 313.665,326.873 313.665,333.223 313.817,333.375 R2.1 314.782,334.594 318.999,334.594 319.938,333.654 C9.2 319.938,332.791 322.783,329.946 U1.19
SW3: C10.2 DOW.1 pad.1 pad.2 R3.1 U1.20 | length 36
  Top Layer w0.508: R3.1@305.74,333.324 R3.1 306.197,333.223 pad.2 ; C10.2 C10.2@319.989,330.124 ; pad.1 C10.2@319.989,330.124 ; U1.20 321.437,328.676 C10.2@319.989,330.124
  Bottom Layer w0.508: DOW.1 299.898,326.009 304.546,330.657 pad.2 313.157,330.657 315.62,328.193 pad.1
SW4: C11.2 R4.1 SET.1 U1.21 | length 34.6
  Top Layer w0.508: SET.1@307.543,317.119 SET.1 307.543,320.065 309.143,321.666 316.281,321.666 C11.2@317.652,320.294 ; R4.1 319.151,315.951 319.151,318.668 C11.2@318.008,319.811 ; C11.2 318.11,320.294 C11.2@317.779,320.294 ; U1.21 324.891,327.406 C11.2@317.779,320.294 ; C11.2@317.652,320.167 C11.2@317.779,320.294 ; C11.2@317.652,320.167 C11.2@317.652,320.294 ; C11.2@317.652,320.167 317.652,319.811 C11.2@318.008,319.811 ; C11.2@317.652,320.167 C11.2@318.008,319.811 ; C11.2@317.652,320.294 C11.2@317.779,320.294
TX: pad.18 pad.20 pad.21 U1.14 UART.3 | length 63.5
  Top Layer w0.508: pad.20 354.381,324.79 pad.21
  Bottom Layer w0.508: pad.18 343.84,335.026 pad.20@350.469,328.397 ; UART.3 348.691,292.075 354.381,297.764 pad.21
VPP: pad.7 PROG_CONNECTOR.5 R6.2 U1.26 | length 32.8
  Top Layer w0.508: R6.2 323.926,321.056 U1.26 326.404,320.929 pad.7@329.108,320.929
  Bottom Layer w0.508: pad.7 330.124,321.005 335.763,326.644 335.763,343.154 336.118,343.51 PROG_CONNECTOR.5
pads on no net: LCD16x2A. LCD16x2A.7 LCD16x2A.8 LCD16x2A.9 LCD16x2A.10 U2.6

## Polygon pours and split planes (outlines as drawn)
GND on Top Layer "Mechanical 5-No Net" (solid, remove dead copper, pour order 14): 362.001,353.085 364.236,350.85 364.236,284.48 364.236,284.378 361.493,281.635 361.366,281.762 297.764,281.762 295.885,283.642 295.758,283.769 295.758,350.596 298.247,353.085 361.874,353.085
GND on Bottom Layer "Mechanical 5-No Net" (solid, remove dead copper, pour order 16): 364.236,284.378 361.442,281.584 297.942,281.584 295.885,283.642 295.758,283.769 295.758,350.596 298.12,352.958 298.247,353.085 361.874,353.085 362.001,353.085 364.236,350.85 364.236,284.378
no net on Internal Plane 1 (split plane): 398.066,271.122 272.087,271.122 272.087,371.701 398.066,371.701
no net on Internal Plane 2 (split plane): 398.066,271.122 272.087,271.122 272.087,371.701 398.066,371.701

## Keep-outs
Keep-Out Layer:
  lines w0.254: 272.847,271.882 397.307,271.882 397.307,370.942 272.847,370.942 272.847,271.882 ; 295.758,283.769 297.942,281.584 361.442,281.584 364.236,284.378 364.236,350.85 362.001,353.085 298.247,353.085 295.758,350.596 295.758,283.769

## Dimensions
272.847,271.882 to 397.307,271.882 on Mechanical 1
272.847,271.882 to 272.847,370.942 on Mechanical 1

## Text inside footprints (layer, text, board x,y; h text height)
U2: Top Overlay "LM2576" at 315.505,301.366 h1.43